# Altium PCB PCB_Claysight-MK2.pcbdoc
Units mil, origin at the board's own origin, x right, y up, seen from the top; angles counter-clockwise.
Board outline 3280.31 x 2271.7 mil, 2 copper layers (Top Layer, Bottom Layer); 11 components, 33 nets, 141 pads, 4 vias.
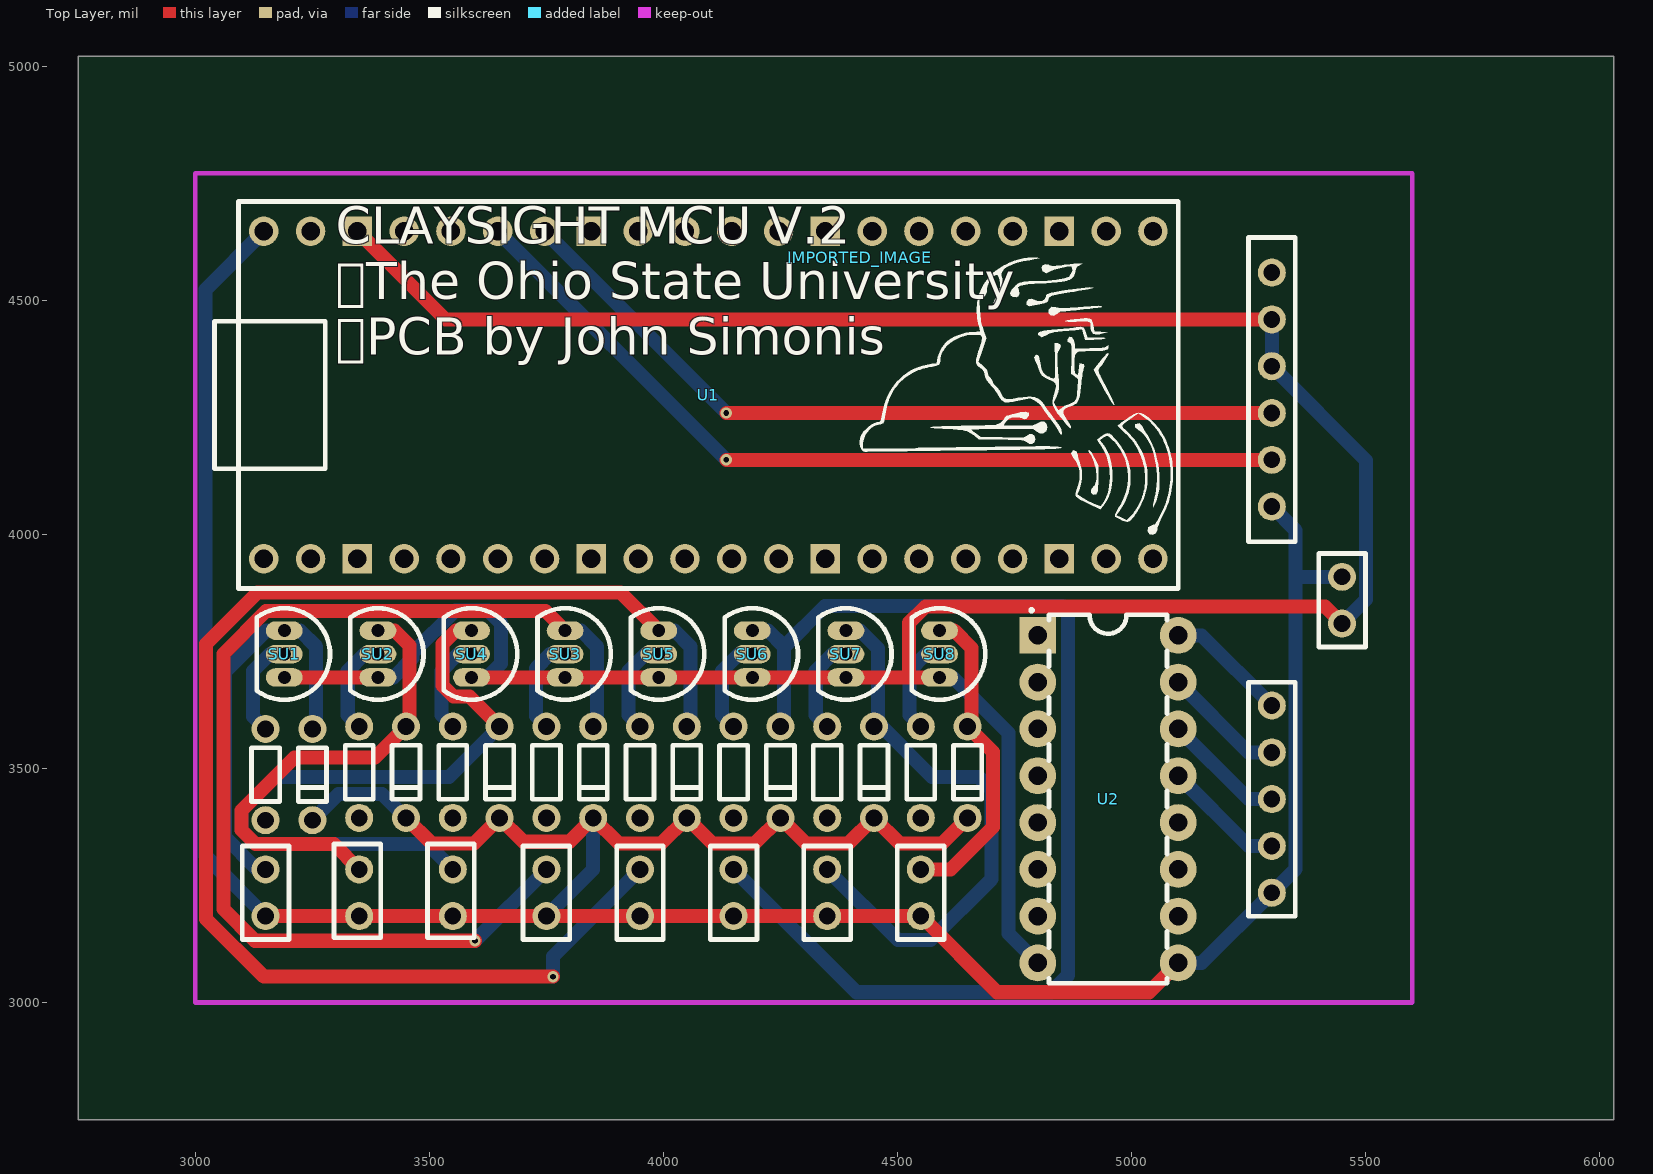
[diagram p0: Top Layer view]
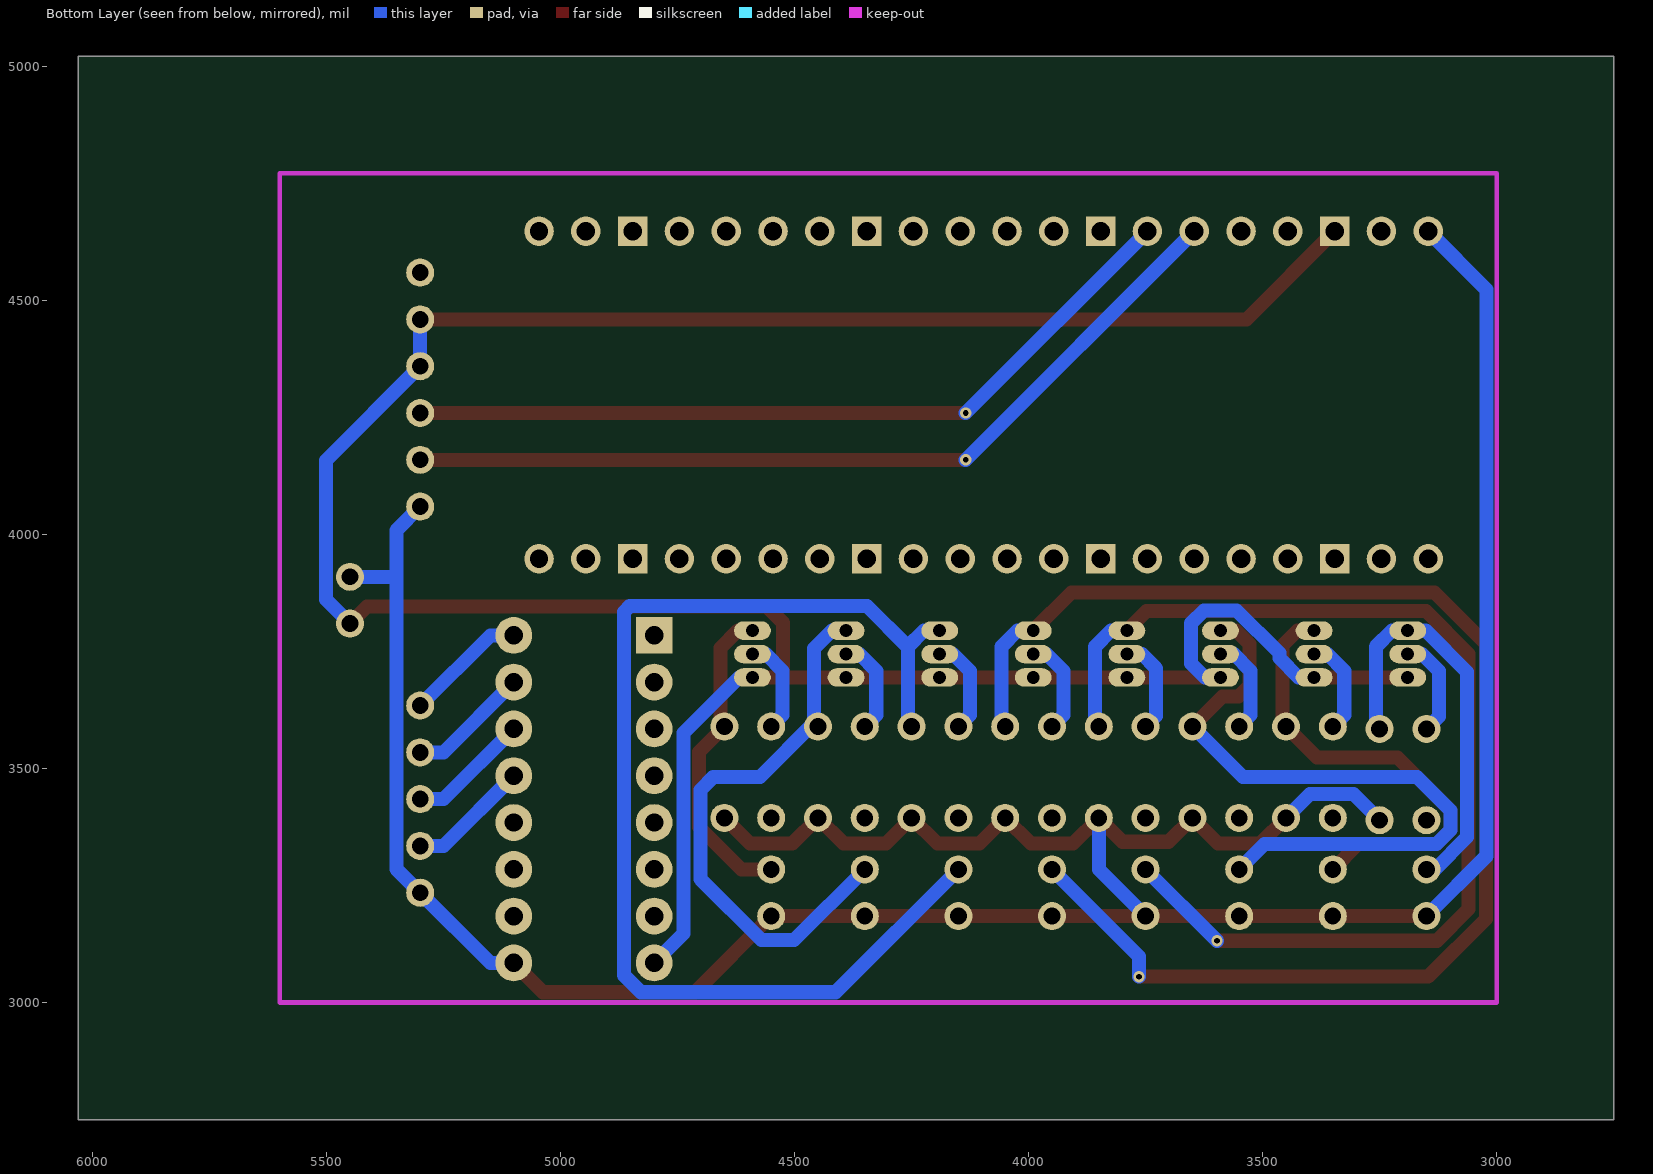
[diagram p1: Bottom Layer view, seen from below]

## Layer stack, top to bottom
Top Layer: signal copper (thickness not stored)
Dielectric: dielectric 12.6, FR-4, Dk 4.8
Bottom Layer: signal copper (thickness not stored)

## Board outline
6030.31,2750 2750,2750 2750,5021.7 6030.31,5021.7

## Design rules (kind name [scope] priority, off if disabled: settings)
Clearance Default [All] p1: gap=7 ignorepadtopadclearanceinfootprint=FALSE except(0: Region-Region; 6: Track-Track SMDPad-Track THPad-Track Via-Track Fill-Track Region-Track Poly-Track Text-Track Sheet-Track Hole-Track Track-SMDPad SMDPad-SMDPad THPad-SMDPad Via-SMDPad Fill-SMDPad Region-SMDPad Poly-SMDPad Text-SMDPad Sheet-SMDPad Hole-SMDPad Track-THPad SMDPad-THPad THPad-THPad Via-THPad Fill-THPad Region-THPad Poly-THPad Text-THPad Sheet-THPad Hole-THPad Track-Via SMDPad-Via THPad-Via Via-Via Fill-Via Region-Via Poly-Via Text-Via Sheet-Via Hole-Via Track-Fill SMDPad-Fill THPad-Fill Via-Fill Fill-Fill Region-Fill Poly-Fill Text-Fill Sheet-Fill Hole-Fill Track-Region SMDPad-Region THPad-Region Via-Region Fill-Region Poly-Region Text-Region Sheet-Region Hole-Region Track-Poly SMDPad-Poly THPad-Poly Via-Poly Fill-Poly Region-Poly Poly-Poly Text-Poly Sheet-Poly Hole-Poly Track-Text SMDPad-Text THPad-Text Via-Text Fill-Text Region-Text Poly-Text Text-Text Sheet-Text Hole-Text Track-Sheet SMDPad-Sheet THPad-Sheet Via-Sheet Fill-Sheet Region-Sheet Poly-Sheet Text-Sheet Sheet-Sheet Hole-Sheet Track-Hole SMDPad-Hole THPad-Hole Via-Hole Fill-Hole Region-Hole Poly-Hole Text-Hole Sheet-Hole Hole-Hole)
PasteMaskExpansion Common [All] p1:
PlaneConnect Default [All] p1: planeconnectstyle=Relief reliefexpansion=20 reliefentries=4 reliefconductorwidth=0 reliefairgap=1
PolygonConnect Default [All] p1: connectstyle=Relief reliefentries=4 polygonreliefangle="90 Angle" airgapwidth=10
RoutingVias Default [All] p1: viastyle="Through Hole" holewidth=12.008000000000001 minholewidth=12.008000000000001 maxholewidth=2362 width=24.016000000000002 minwidth=24.016000000000002 maxwidth=3938
SolderMaskExpansion Common [All] p1: useseparateexpansions=TRUE expansion=2 expansionbottom=2
Width Default [All] p1: maxlimit=1000 minlimit=30 preferedwidth=30

## Components (designator, comment, footprint, x,y, rotation, side; value= is the part's Value field where it differs from the comment)
IMPORTED_IMAGE "IMPORTED_IMAGE" IMPORTED_IMAGE 4419.7,4591.36 r0 top
SU1 "TO-92(TO-92-3)" TO-92(TO-92-3) 3200,3784.69 r0 top
SU2 "TO-92(TO-92-3)" TO-92(TO-92-3) 3400,3784.69 r0 top
SU3 "TO-92(TO-92-3)" TO-92(TO-92-3) 3800,3784.69 r0 top
SU4 "TO-92(TO-92-3)" TO-92(TO-92-3) 3600,3784.69 r0 top
SU5 "TO-92(TO-92-3)" TO-92(TO-92-3) 4000,3784.69 r0 top
SU6 "TO-92(TO-92-3)" TO-92(TO-92-3) 4200,3784.69 r0 top
SU7 "TO-92(TO-92-3)" TO-92(TO-92-3) 4400,3784.69 r0 top
SU8 "TO-92(TO-92-3)" TO-92(TO-92-3) 4600,3784.69 r0 top
U1 "RASPBERRY PI PICO/ RASPBERRY PI PICO W" "RASPBERRY PI PICO/ RASPBERRY PI PICO W" 5100,3884.69 r90 top
U2 "ULN2003A" ULN2003A 4800,3784.69 r270 top

## Footprints (in the part's own frame and the unit in brackets; to place one, negate y for a bottom-side part, rotate by r counter-clockwise, add the part's x,y. Pads: shape width x height; smd on the part's side, far side on the other; paste and mask are expansions set on the pad)
IMPORTED_IMAGE [mil]
  silkscreen extent 0,-592 669,0
"RASPBERRY PI PICO/ RASPBERRY PI PICO W" [mm]
  round 1.6 hole 1: 1(1.61,49.63) 2(1.61,47.09) 4(1.61,42.01) 5(1.61,39.47) 6(1.61,36.93) 7(1.61,34.39) 9(1.61,29.31) 10(1.61,26.77) 11(1.61,24.23) 12(1.61,21.69) 14(1.61,16.61) 15(1.61,14.07) 16(1.61,11.53) 17(1.61,8.99) 19(1.61,3.91) 20(1.61,1.37) 21(19.39,1.37) 22(19.39,3.91) 24(19.39,8.99) 25(19.39,11.53) 26(19.39,14.07) 27(19.39,16.61)
  rect 1.6x1.6 hole 1: 3(1.61,44.55) 8(1.61,31.85) 13(1.61,19.15) 18(1.61,6.45) 23(19.39,6.45) 28(19.39,19.15) 33(19.39,31.85) 38(19.39,44.55)
  round 1.6 hole 1 copper offset 0,0: 29(19.39,21.69) 30(19.39,24.23) 31(19.39,26.77) 32(19.39,29.31) 34(19.39,34.39) 35(19.39,36.93) 36(19.39,39.47) 37(19.39,42.01) 39(19.39,47.09) 40(19.39,49.63)
  silkscreen extent 0,0 21,52.3
TO-92(TO-92-3) [mil]
  oval 78.74x39.37 hole 27.56: 1(-10,10) 2(-10,-40) 3(-10,-90)
  silkscreen extent -69,-138 88,58
ULN2003A [mm]
  rect 2x2 hole 1: 1(0,0)
  round 2 hole 1: 2(2.54,0) 3(5.08,0) 4(7.62,0) 5(10.16,0) 6(12.7,0) 7(15.24,0) 8(17.78,0) 9(17.78,7.62) 10(15.24,7.62) 11(12.7,7.62) 12(10.16,7.62) 13(7.62,7.62) 14(5.08,7.62) 15(2.54,7.62) 16(0,7.62)
  silkscreen extent -1.41,-0.39 18.89,7.01

## Free pads (board coordinates)
  round 60 hole 36: 2(3150,3584.69) 2(3250,3584.69) 2(3350,3589.69) 2(3450,3589.69) 2(3550,3589.69) 2(3650,3589.69) 2(3750,3589.69) 2(3850,3589.69) 2(3950,3589.69) 2(4050,3589.69) 2(4150,3589.69) 2(4250,3589.69) 2(4350,3589.69) 2(4450,3589.69) 2(4550,3589.69) 2(4650,3589.69) 3(3150,3389.69) 3(3250,3389.69) 3(3350,3394.69) 3(3450,3394.69) 3(3550,3394.69) 3(3650,3394.69) 3(3750,3394.69) 3(3850,3394.69) 3(3950,3394.69) 3(4050,3394.69) 3(4150,3394.69) 3(4250,3394.69) 3(4350,3394.69) 3(4450,3394.69) 3(4550,3394.69) 3(4650,3394.69) 4(5300,4059.68) 5(5300,4159.69) 6(5300,4259.69) 7(5300,4359.69) 8(5300,4459.69) 9(5300,4559.69) 11(5300,3234.68) 12(5300,3334.68) 13(5300,3434.68) 14(5300,3534.68) 15(5300,3634.68) 17(5450.01,3809.69) 18(5450.01,3909.69) 19(3150,3184.68) 20(3150,3284.68) 21(3350,3184.68) 23(3350,3284.68) 24(3550,3284.68) 25(3550,3184.68) 26(3750,3284.68) 27(3750,3184.68) 28(3950,3284.68) 29(3950,3184.68) 30(4150,3284.68) 31(4150,3184.68) 32(4350,3284.68) 33(4350,3184.68) 34(4550,3284.68) 35(4550,3184.68)

## Via types
v1: diameter 24.02, hole 12.01, Top Layer to Bottom Layer, 4 vias

## Nets (pads, with @x,y where several pads share a name; then routed paths per layer and width w, separated by ;. In a path a pad name is that pad's centre, name@x,y a point inside that pad or via, vN(x,y) a via of type N, cw(c..) or ccw(c..) an arc to the next point about the centre after c; other vN are vias at no path point)
N$12975: pad.7 pad.8 pad.17 SU1.3 SU2.3 SU3.3 SU4.3 SU5.3 SU6.3 SU7.3 SU8.3 U1.38 U2.8 | length 6272.8
  Top Layer w30: SU1.3 SU2.3 ; U1.38 3534.45,4459.69 pad.8 ; SU4.3 SU3.3 SU5.3 SU6.3 SU7.3 4524.8,3694.69 ; SU8.3 4524.8,3694.69 ; pad.17 5413.29,3846.4 4559.61,3846.4 4524.8,3811.59 4524.8,3694.69
  Bottom Layer w30: SU2.3 3422.86,3694.69 3464.02,3735.85 3464.02,3746.5 3555.37,3837.85 3625.34,3837.85 3652.69,3810.5 3652.69,3724.23 3623.15,3694.69 SU4.3 ; SU8.3 4618.65,3694.69 4737.1,3576.24 4737.1,3147.59 U2.8 ; pad.8 pad.7 5501.31,4158.38 5501.31,3861 pad.17
N$12982: pad.3@3250,3389.69 pad.3@3450,3394.69 pad.3@3650,3394.69 pad.3@3850,3394.69 pad.3@4050,3394.69 pad.3@4250,3394.69 pad.3@4450,3394.69 pad.3@4650,3394.69 pad.4 pad.11 pad.18 pad.19 pad.21 pad.25 pad.27 pad.29 pad.31 pad.33 pad.35 U1.40 U2.9 | length 6805.3
  Top Layer w30: pad.19 pad.21 pad.25 pad.27 pad.29 pad.31 pad.33 pad.35 4712.64,3022.06 5037.37,3022.06 U2.9 ; pad.3@3450,3394.69 3504.99,3339.7 3595.01,3339.7 3650,3394.69 3701.06,3343.63 3798.94,3343.63 3850,3394.69 3904.99,3339.7 3995.01,3339.7 4050,3394.69 4104.99,3339.7 4195.01,3339.7 4250,3394.69 4304.99,3339.7 4395.01,3339.7 4450,3394.69 4504.99,3339.7 4595.01,3339.7 pad.3@4650,3394.69
  Bottom Layer w30: U1.40 3022.06,4524.06 3022.06,3312.64 pad.19 ; pad.3@3250,3389.69 3306.05,3445.74 3398.95,3445.74 pad.3@3450,3394.69 ; pad.27 3850,3284.7 pad.3@3850,3394.69 ; U2.9 5150,3084.69 pad.11 5351.06,3285.75 5351.06,3909.69 ; pad.4 5351.06,4008.63 5351.06,3909.69 ; pad.18 5351.06,3909.69
N$13085: 
N$13092: pad.2@3350,3589.69 SU2.2 | length 208.5
  Bottom Layer w30: pad.2@3350,3589.69 3325.53,3614.16 3325.53,3708.68 3361.54,3744.69 SU2.2
N$13099: pad.2@3550,3589.69 SU4.2 | length 208.5
  Bottom Layer w30: pad.2@3550,3589.69 3525.53,3614.16 3525.53,3708.68 3561.54,3744.69 SU4.2
N$13106: pad.2@3750,3589.69 SU3.2 | length 209
  Bottom Layer w30: pad.2@3750,3589.69 3727.47,3612.22 3727.47,3714.28 3757.88,3744.69 SU3.2
N$13113: pad.2@3950,3589.69 SU5.2 | length 208.5
  Bottom Layer w30: pad.2@3950,3589.69 3925.53,3614.16 3925.53,3708.68 3961.54,3744.69 SU5.2
N$13120: pad.2@4150,3589.69 SU6.2 | length 208.5
  Bottom Layer w30: pad.2@4150,3589.69 4125.53,3614.16 4125.53,3708.68 4161.54,3744.69 SU6.2
N$13127: pad.2@4350,3589.69 SU7.2 | length 208.5
  Bottom Layer w30: pad.2@4350,3589.69 4325.53,3614.16 4325.53,3708.68 4361.54,3744.69 SU7.2
N$13134: pad.2@4550,3589.69 SU8.2 | length 208.5
  Bottom Layer w30: pad.2@4550,3589.69 4525.53,3614.16 4525.53,3708.68 4561.54,3744.69 SU8.2
N$13189: pad.2@3250,3584.69 pad.20 SU1.1 | length 893.4
  Bottom Layer w30: pad.20 3131.82,3284.7 3062.9,3353.62 3062.9,3706.19 3151.4,3794.69 SU1.1 3223.78,3794.69 3258.17,3760.3 3258.17,3592.86 pad.2@3250,3584.69
N$13196: pad.2@3450,3589.69 pad.23 SU2.1 | length 1009.8
  Top Layer w30: pad.23 3296.06,3338.64 3128.86,3338.64 3098.95,3368.55 3098.95,3410.83 3211.32,3523.2 3383.51,3523.2 3450,3589.69 3457.26,3596.95 3457.26,3762.86 3425.43,3794.69 SU2.1
N$13203: pad.2@3650,3589.69 pad.24 SU4.1 | length 1474.3
  Top Layer w30: SU4.1 3556.53,3794.69 3527.98,3766.14 3527.98,3677.18 3551.21,3653.95 3585.74,3653.95 pad.2@3650,3589.69
  Bottom Layer w30: pad.24 3496.06,3338.64 3128.86,3338.64 3098.95,3368.55 3098.95,3410.83 3169.91,3481.79 3542.1,3481.79 pad.2@3650,3589.69
N$13210: pad.2@3850,3589.69 pad.26 SU3.1 | length 2368.4
  Top Layer w30: v1(3597.38,3132.08) 3127.64,3132.08 3059.77,3199.95 3059.77,3744.98 3151.25,3836.46 3748.23,3836.46 SU3.1
  Bottom Layer w30: v1(3597.38,3132.08) pad.26 ; SU3.1 3823.78,3794.69 3858.17,3760.3 3858.17,3597.86 pad.2@3850,3589.69
N$13217: pad.2@4050,3589.69 pad.28 SU5.1 | length 2989.6
  Top Layer w30: v1(3764.15,3055.23) 3146.66,3055.23 3022.89,3179 3022.89,3766.57 3132.93,3876.61 3908.08,3876.61 SU5.1
  Bottom Layer w30: v1(3764.15,3055.23) 3764.15,3098.85 pad.28 ; SU5.1 4023.78,3794.69 4058.17,3760.3 4058.17,3597.86 pad.2@4050,3589.69
N$13224: pad.2@4250,3589.69 pad.30 SU6.1 | length 2518.5
  Bottom Layer w30: pad.30 4412.64,3022.06 4828.09,3022.06 4864.41,3058.38 4864.41,3834.95 4852.18,3847.18 4345.05,3847.18 4258.17,3760.3 ; SU6.1 4223.78,3794.69 4258.17,3760.3 ; pad.2@4250,3589.69 4258.17,3597.86 4258.17,3760.3
N$13231: pad.2@4450,3589.69 pad.32 SU7.1 | length 1214.9
  Bottom Layer w30: pad.32 4501.05,3133.65 4571.15,3133.65 4701.05,3263.55 4701.05,3454.53 4673.79,3481.79 4574.24,3481.79 pad.2@4458.17,3597.86 ; SU7.1 4420.15,3794.69 4458.17,3756.67 pad.2@4458.17,3597.86 ; pad.2@4450,3589.69 pad.2@4458.17,3597.86
N$13238: pad.2@4650,3589.69 pad.34 SU8.1 | length 683.8
  Top Layer w30: pad.34 4613.85,3284.7 4704.4,3375.25 4704.4,3535.29 4650,3589.69 4658.03,3597.72 4658.03,3758.05 4621.39,3794.69 SU8.1
N$13245: pad.15 U2.16 | length 262.1
  Bottom Layer w30: U2.16 5150,3784.69 pad.15
N$13252: pad.14 U2.15 | length 262.1
  Bottom Layer w30: U2.15 5250,3534.69 pad.14
N$13259: pad.13 U2.14 | length 262.1
  Bottom Layer w30: U2.14 5250,3434.69 pad.13
N$13266: pad.12 U2.13 | length 262.1
  Bottom Layer w30: U2.13 5250,3334.69 pad.12
N$13501: pad.5 U1.35 | length 1856.2
  Top Layer w30: v1(4134.45,4159.69) pad.5
  Bottom Layer w30: U1.35 v1(4134.45,4159.69)
N$13508: pad.6 U1.34 | length 1714.8
  Top Layer w30: v1(4134.45,4259.69) pad.6
  Bottom Layer w30: U1.34 v1(4134.45,4259.69)
S$38: 
S$11172: 
S$11176: 
S$11180: 
S$11184: 
S$11188: 
S$11196: 
S$11200: 
S$11204: 
pads on no net: SU1.2 U1.1 U1.2 U1.3 U1.4 U1.5 U1.6 U1.7 U1.8 U1.9 U1.10 U1.11 U1.12 U1.13 U1.14 U1.15 U1.16 U1.17 U1.18 U1.19 U1.20 U1.21 U1.22 U1.23 U1.24 U1.25 U1.26 U1.27 U1.28 U1.29 U1.30 U1.31 U1.32 U1.33 U1.36 U1.37 U1.39 U2.1 U2.2 U2.3 U2.4 U2.5 U2.6 U2.7 U2.10 U2.11 U2.12
copper on no net: | length 217
  Bottom Layer w30: 3150,3584.69 3123.07,3611.62 3123.07,3708.72 3159.04,3744.69 3190,3744.69

## Keep-outs
Board Outline Layer:
  lines w10: 3000,3000 3000,4771.7 5600,4771.7 5600,3000 3000,3000

## Silkscreen, mask and mechanical layers (free items; w line width, h text height)
Top Silkscreen Layer:
  lines w10: 3100,3134.69 3200,3134.69 3200,3334.69 3100,3334.69 3100,3134.69 ; 3296.06,3138.64 3396.06,3138.64 3396.06,3338.64 3296.06,3338.64 3296.06,3138.64 ; 3496.06,3138.64 3596.06,3138.64 3596.06,3338.64 3496.06,3338.64 3496.06,3138.64 ; 3700,3134.69 3800,3134.69 3800,3334.69 3700,3334.69 3700,3134.69 ; 3900,3134.69 4000,3134.69 4000,3334.69 3900,3334.69 3900,3134.69 ; 4100,3134.69 4200,3134.69 4200,3334.69 4100,3334.69 4100,3134.69 ; 4300,3134.69 4400,3134.69 4400,3334.69 4300,3334.69 4300,3134.69 ; 4500,3134.69 4600,3134.69 4600,3334.69 4500,3334.69 4500,3134.69 ; 5250,3184.7 5350,3184.7 5350,3684.7 5250,3684.7 5250,3184.7 ; 5250,3984.69 5350,3984.69 5350,4634.69 5250,4634.69 5250,3984.69 ; 5400,3759.69 5500,3759.69 5500,3959.69 5400,3959.69 5400,3759.69
  lines w10 net S$11172: 3225,3459.7 3275,3459.7
  lines w10 net S$11176: 3425,3459.7 3475,3459.7
  lines w10 net S$11180: 3625,3459.7 3675,3459.7
  lines w10 net S$11184: 3825,3459.7 3875,3459.7
  lines w10 net S$11188: 4025,3459.7 4075,3459.7
  lines w10 net S$11196: 4225,3459.7 4275,3459.7
  lines w10 net S$11200: 4424.99,3459.7 4474.99,3459.7
  lines w10 net S$11204: 4624.99,3459.7 4674.99,3459.7
  lines w10 net S$38: 3120,3429.7 3180,3429.7 3180,3544.7 3120,3544.7 3120,3429.7 ; 3220,3429.7 3280,3429.7 3280,3544.7 3220,3544.7 3220,3429.7 ; 3320,3434.7 3380,3434.7 3380,3549.7 3320,3549.7 3320,3434.7 ; 3420,3434.7 3480,3434.7 3480,3549.7 3420,3549.7 3420,3434.7 ; 3520,3434.7 3580,3434.7 3580,3549.7 3520,3549.7 3520,3434.7 ; 3620,3434.7 3680,3434.7 3680,3549.7 3620,3549.7 3620,3434.7 ; 3720,3434.7 3780,3434.7 3780,3549.7 3720,3549.7 3720,3434.7 ; 3820,3434.7 3880,3434.7 3880,3549.7 3820,3549.7 3820,3434.7 ; 3920,3434.7 3980,3434.7 3980,3549.7 3920,3549.7 3920,3434.7 ; 4020,3434.7 4080,3434.7 4080,3549.7 4020,3549.7 4020,3434.7 ; 4120,3434.7 4180,3434.7 4180,3549.7 4120,3549.7 4120,3434.7 ; 4220,3434.7 4280,3434.7 4280,3549.7 4220,3549.7 4220,3434.7 ; 4319.99,3434.7 4379.99,3434.7 4379.99,3549.7 4319.99,3549.7 4319.99,3434.7 ; 4419.99,3434.7 4479.99,3434.7 4479.99,3549.7 4419.99,3549.7 4419.99,3434.7 ; 4519.99,3434.7 4579.99,3434.7 4579.99,3549.7 4519.99,3549.7 4519.99,3434.7 ; 4619.99,3434.7 4679.99,3434.7 4679.99,3549.7 4619.99,3549.7 4619.99,3434.7
  text "CLAYSIGHT MCU V.2 /  The Ohio State University /  PCB by John Simonis" at 3300,4384.69 h78.74